# EAGLE board micromod (EAGLE 7.3.0)
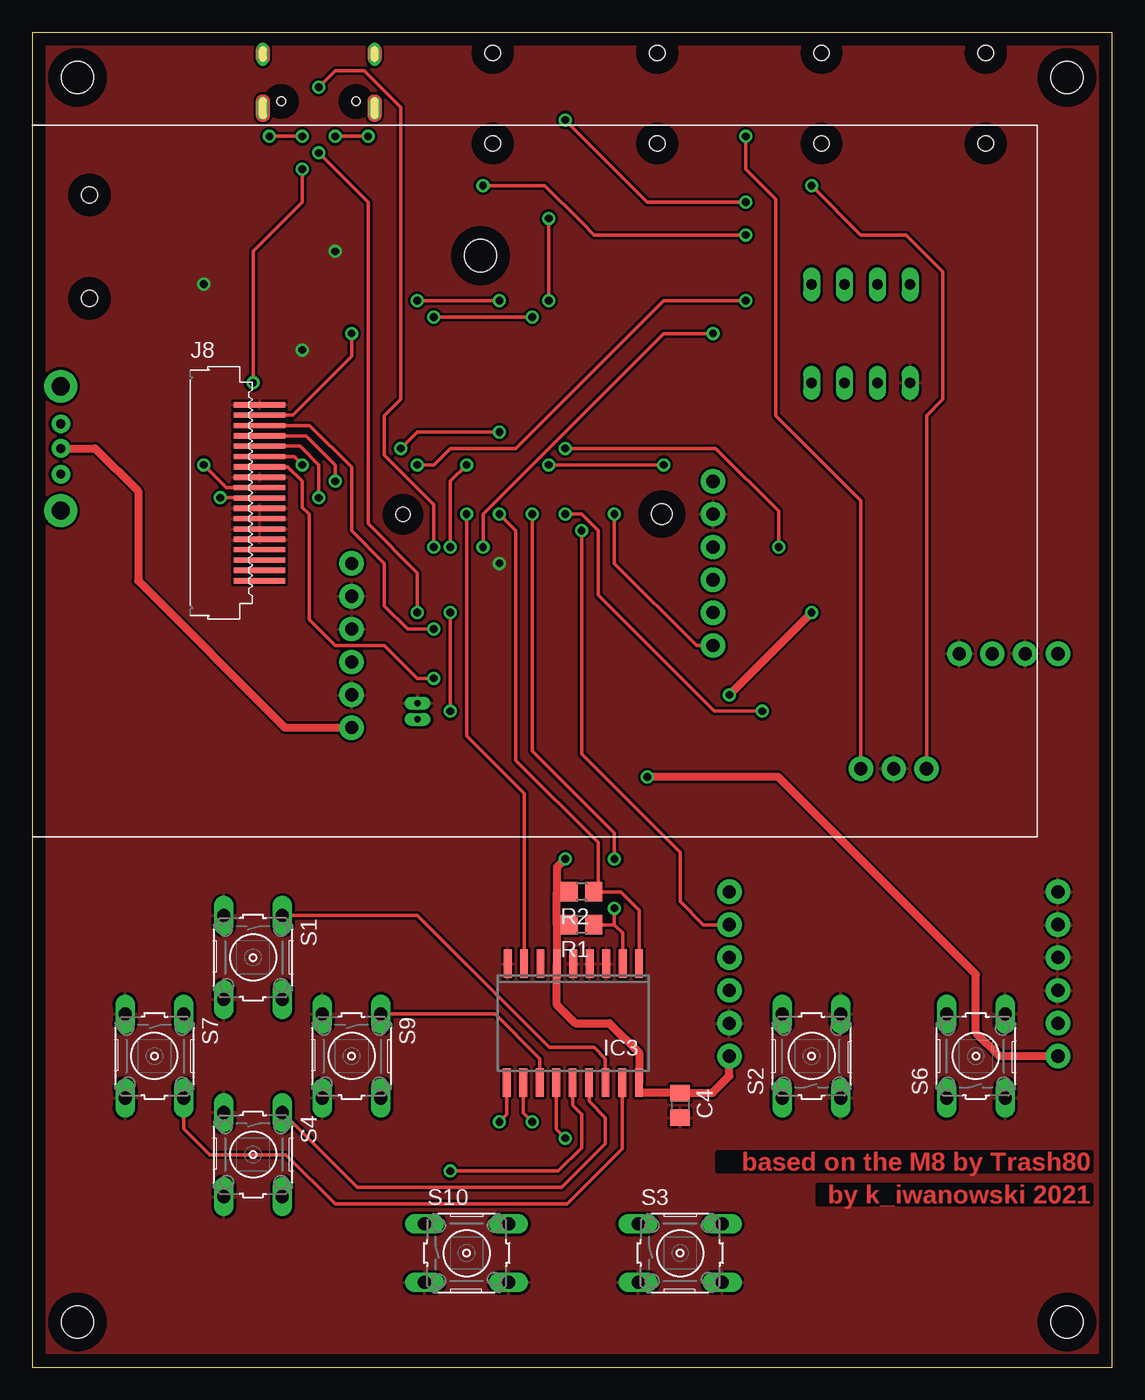
[diagram p0: board, top side]
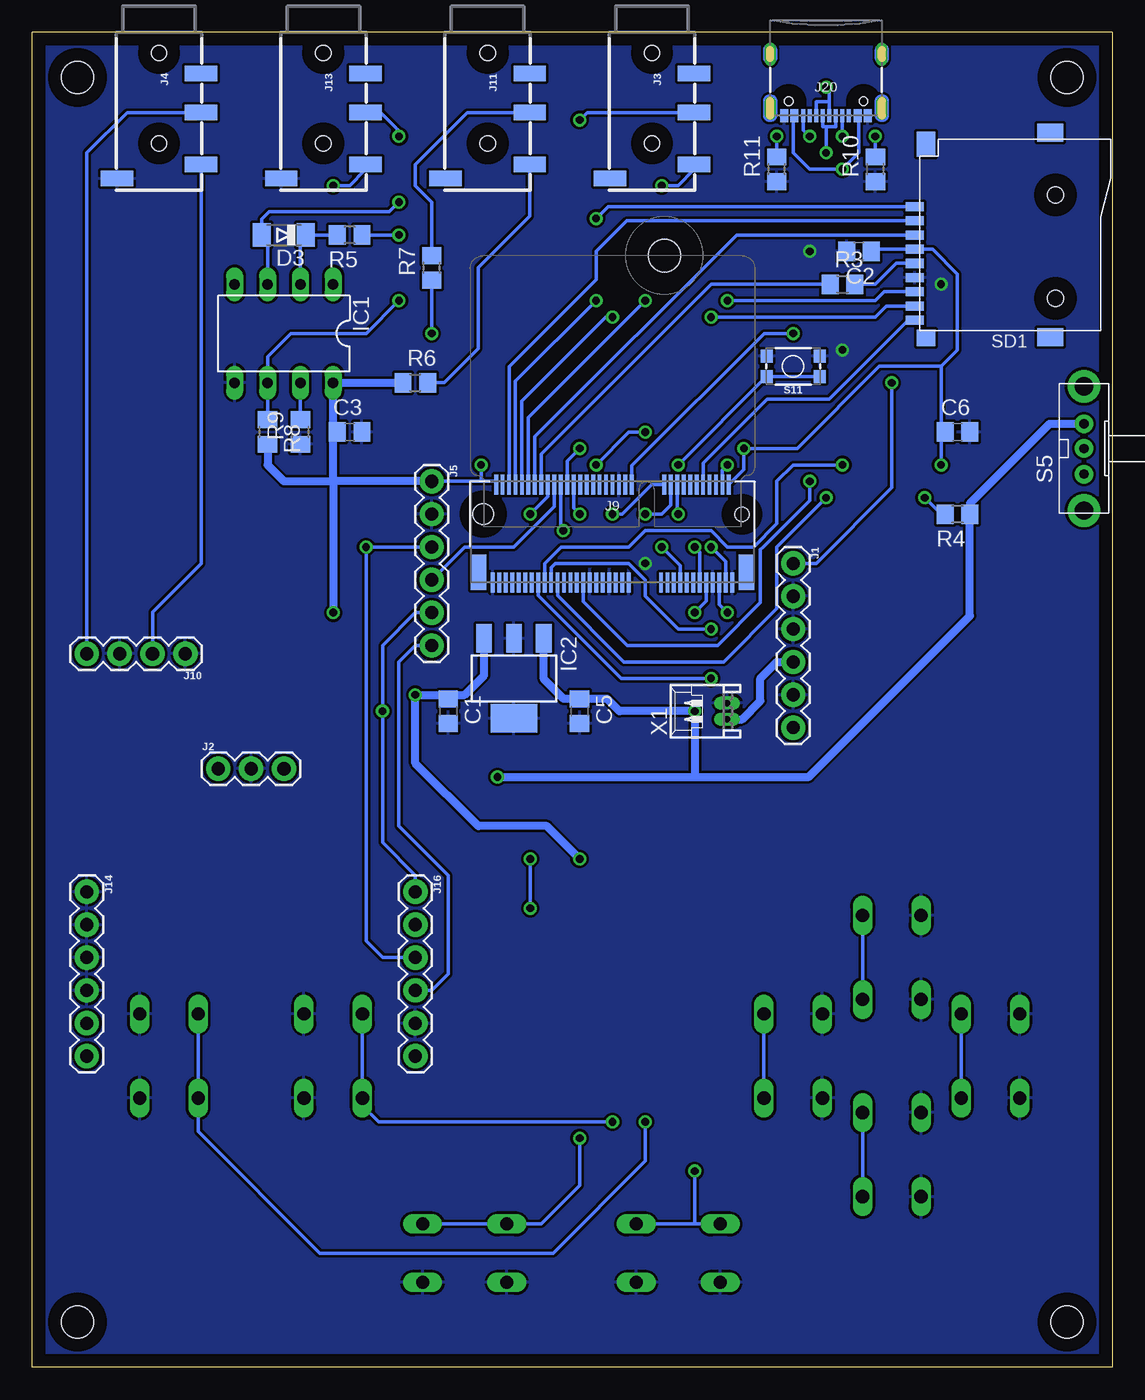
[diagram p1: board, bottom side, seen from below]

Size 83.5 x 103.23 mm. Coordinates in mm from the lower left corner, seen from the top.
Outline: 0,103.23 0,0 83.5,0 83.5,103.23 0,103.23
Copper layers (1*16): Top 0.035mm / dielectric 1.5mm / Bottom 0.035mm
Design rules "default *": minimum track width 8mil, minimum drill 24mil, track to track 8mil, track to pad 8mil, pad to pad 8mil, via to via 8mil, smd to smd 8mil, copper to edge 40mil, drill to drill 8mil, minimum pad ring 10mil, minimum via ring 8mil, stop-mask expansion 4mil, vias tented up to drill 0mil, thermal gap 8mil
Holes 2.5 mm at 3.5,99.73 80,99.73 3.5,3.5 80,3.5 34.64,85.96

## Footprints (pad centres in the part's own frame; a part is rotated, then mirrored left to right if it is on the bottom)
C0805 = smd 1.3 x 1.5: 1 -0.95,0; 2 0.95,0
MINIMELF = smd 1.4 x 1.8: A 1.7,0; C -1.7,0
DIL08 = drill 0.813 long: 1 -3.81,-3.81; 2 -1.27,-3.81; 3 1.27,-3.81; 4 3.81,-3.81; 5 3.81,3.81; 6 1.27,3.81; 7 -1.27,3.81; 8 -3.81,3.81
SOT223 = smd 1.219 x 2.235: 1 -2.311,-3.099; 2 0,-3.099; 3 2.311,-3.099 | smd 3.6 x 2.2: 4 0,3.099
SO18W = smd 0.6 x 2.2: 1 -4.445,-4.6; 2 -3.175,-4.6; 3 -1.905,-4.6; 4 -0.635,-4.6; 5 0.635,-4.6; 6 1.905,-4.6; 7 3.175,-4.6; 8 4.445,-4.6; 9 5.715,-4.6; 10 5.775,4.6; 11 4.505,4.6; 12 3.235,4.6; 13 1.965,4.6; 14 0.695,4.6; 15 -0.575,4.6; 16 -1.845,4.6; 17 -3.145,4.6; 18 -4.445,4.6
1X06 = drill 1.016 pad 1.88: 1 0,0; 2 2.54,0; 3 5.08,0; 4 7.62,0; 5 10.16,0; 6 12.7,0
1X03 = drill 1.016 pad 1.88: 1 0,0; 2 2.54,0; 3 5.08,0
AUDIO_JACK_3.5MM_TRRS_SMD_RA = smd 1.2 x 2.5: EARTH 11.3,-3.25; RING1 6.2,3.25; RING2 3.2,3.25; TIP 10.2,3.25 | hole 1.2: 1.6,0; 8.6,0
XF2E-2015-1 = smd 4 x 0.4: 2 2.54,6.8; 3 2.54,6; 4 2.54,5.2; 5 2.54,4.4; 6 2.54,3.6; 7 2.54,2.8; 8 2.54,2; 9 2.54,1.2; 10 2.54,0.4; 11 2.54,-0.4; 12 2.54,-1.2; 13 2.54,-2; 14 2.54,-2.8; 15 2.54,-3.6; 16 2.54,-4.4; 17 2.54,-5.2; 18 2.54,-6; 19 2.54,-6.8
M.2-CONNECTOR-E = smd 0.3 x 1.55: 1 9.25,-5.275; 2 9,2.275; 3 8.75,-5.275; 4 8.5,2.275; 5 8.25,-5.275; 6 8,2.275; 7 7.75,-5.275; 8 7.5,2.275; 9 7.25,-5.275; 10 7,2.275; 11 6.75,-5.275; 12 6.5,2.275; 13 6.25,-5.275; 14 6,2.275; 15 5.75,-5.275; 16 5.5,2.275; 17 5.25,-5.275; 18 5,2.275; 19 4.75,-5.275; 20 4.5,2.275; 21 4.25,-5.275; 22 4,2.275; 23 3.75,-5.275; 32 1.5,2.275; 33 1.25,-5.275; 34 1,2.275; 35 0.75,-5.275; 36 0.5,2.275; 37 0.25,-5.275; 38 0,2.275; 39 -0.25,-5.275; 40 -0.5,2.275; 41 -0.75,-5.275; 42 -1,2.275; 43 -1.25,-5.275; 44 -1.5,2.275; 45 -1.75,-5.275; 46 -2,2.275; 47 -2.25,-5.275; 48 -2.5,2.275; 49 -2.75,-5.275; 50 -3,2.275; 51 -3.25,-5.275; 52 -3.5,2.275; 53 -3.75,-5.275; 54 -4,2.275; 55 -4.25,-5.275; 56 -4.5,2.275; 57 -4.75,-5.275; 58 -5,2.275; 59 -5.25,-5.275; 60 -5.5,2.275; 61 -5.75,-5.275; 62 -6,2.275; 63 -6.25,-5.275; 64 -6.5,2.275; 65 -6.75,-5.275; 66 -7,2.275; 67 -7.25,-5.275; 68 -7.5,2.275; 69 -7.75,-5.275; 70 -8,2.275; 71 -8.25,-5.275; 72 -8.5,2.275; 73 -8.75,-5.275; 74 -9,2.275; 75 -9.25,-5.275 | smd 1.2 x 2.75: A1 10.35,-4.5; A2 -10.35,-4.5 | hole 1.1: 10,0 | hole 1.6: -10,0
1X04 = drill 1.016 pad 1.88: 1 0,0; 2 2.54,0; 3 5.08,0; 4 7.62,0
USB-C-16P-2LAYER-PADS = smd 0.3 x 1: A5 -1.25,-0.34; A6 -0.25,-0.34; A7 0.25,-0.34; A8 1.25,-0.34; B5 1.75,-0.34; B6 0.75,-0.34; B7 -0.75,-0.34; B8 -1.75,-0.34 | smd 0.6 x 1: GND -3.225,-0.34; GND2 3.225,-0.34; VBUS1 -2.45,-0.34; VBUS2 2.45,-0.34 | drill 0.4 pad 0.6 long: SHLD1 -4.318,-0.915; SHLD2 4.318,-0.915; SHLD3 -4.318,-5.095; SHLD4 4.318,-5.095 | hole 0.65: -2.89,-1.445; 2.89,-1.445
R0805 = smd 1.3 x 1.5: 1 -0.95,0; 2 0.95,0
B3F-10XX = drill 1.016 long: 1 -3.251,2.261; 2 3.251,2.261; 3 -3.251,-2.261; 4 3.251,-2.261
EG1213 = drill 0.7 pad 1.422: 1 -2,0; 2 0,0; 3 1.9,0 | drill 1.4 pad 2.54: MT1 -4.8,0; MT2 4.8,0
TACTILE_SWITCH_SMD_4.6X2.8MM = smd 0.9 x 1: 1 -2.05,-0.8; 2 2.05,-0.8; 3 2.05,0.8; 4 -2.05,0.8
TF-PULL = smd 0.7 x 1.4: 1 -2.2,-7.62; 2 -1.1,-7.62; 3 0,-7.62; 4 1.1,-7.62; 5 2.2,-7.62; 6 3.3,-7.62; 7 4.4,-7.62; 8 5.5,-7.62; 9 6.6,-7.62 | smd 1.4 x 2: S1 -7.9,2.85; S2 7.9,2.85 | smd 1.28 x 1.4: S3 7.96,-6.75 | smd 1.95 x 1.4: S4 -7.025,-6.75 | hole 1.25: -3.1,3.25; 4.9,3.25
53048-02 = drill 0.5 pad 0.698 long: 1 0.625,-1.25; 2 -0.625,-1.25

## Placement (x,y rotation side)
C1  10u  [C0805]  51.35,50.73 270 bottom
C2  10u  [C0805]  19.6,86.29 180 bottom
C3  100n  [C0805]  58.97,72.32 0 bottom
C4  100n  [C0805]  50.08,20.25 270 top
C5  10u  [C0805]  41.19,50.73 270 bottom
C6  100n  [C0805]  11.98,72.32 0 bottom
D3  [MINIMELF]  64.05,87.56 180 bottom
IC1  [DIL08]  64.05,79.94 180 bottom
IC2  [SOT223]  46.27,53.27 180 bottom
IC3  MCP23008/SO  [SO18W]  42.46,26.6 180 top
J1  [1X06]  24.68,62.16 270 bottom
J2  455-1750-1-ND  [1X03]  69.13,46.29 0 bottom
J3  AUDIO_JACK_TRRSSMD_RA  [AUDIO_JACK_3.5MM_TRRS_SMD_RA]  35.6,103.23 270 bottom
J4  AUDIO_JACK_TRRSSMD_RA  [AUDIO_JACK_3.5MM_TRRS_SMD_RA]  73.7,103.23 270 bottom
J5  [1X06]  52.62,68.51 270 bottom
J8  XF2E-2015-1  [XF2E-2015-1]  15.03,67.62 0 top
J9  MICROMOD-2222-C  [M.2-CONNECTOR-E]  38.65,65.97 0 bottom
J10  [1X04]  71.67,55.17 180 bottom
J11  AUDIO_JACK_TRRSSMD_RA  [AUDIO_JACK_3.5MM_TRRS_SMD_RA]  48.3,103.23 270 bottom
J13  AUDIO_JACK_TRRSSMD_RA  [AUDIO_JACK_3.5MM_TRRS_SMD_RA]  61,103.23 270 bottom
J14  [1X06]  79.29,36.76 270 bottom
J16  [1X06]  53.89,36.76 270 bottom
J20  [USB-C-16P-2LAYER-PADS]  22.14,96.45 180 bottom
R1  2k2  [R0805]  42.46,34.22 180 top
R2  2k2  [R0805]  42.46,36.76 180 top
R3  33  [R0805]  20.87,83.75 0 bottom
R4  68  [R0805]  11.98,65.97 180 bottom
R5  220  [R0805]  58.97,87.56 180 bottom
R6  33  [R0805]  53.89,76.13 0 bottom
R7  10  [R0805]  52.62,85.02 90 bottom
R8  470  [R0805]  65.32,72.32 270 bottom
R9  1k  [R0805]  62.78,72.32 90 bottom
R10  5k1  [R0805]  18.33,92.64 90 bottom
R11  5k1  [R0805]  25.95,92.64 90 bottom
S1  [B3F-10XX]  17.06,31.68 270 top
S2  [B3F-10XX]  60.24,24.06 90 top
S3  [B3F-10XX]  50.08,8.82 0 top
S4  [B3F-10XX]  17.06,16.44 270 top
S5  EG1213  [EG1213]  2.2,71.05 90 bottom
S6  [B3F-10XX]  72.94,24.06 90 top
S7  [B3F-10XX]  9.44,24.06 270 top
S9  [B3F-10XX]  24.68,24.06 270 top
S10  [B3F-10XX]  33.57,8.82 0 top
S11  MOMENTARY-SWITCH-SPST-SMD-4.6X2.8MM  [TACTILE_SWITCH_SMD_4.6X2.8MM]  24.68,77.4 180 bottom
SD1  TF-HOLDER  [TF-PULL]  7.66,87.56 270 bottom
X1  53048-02  [53048-02]  31.03,50.73 90 bottom

## Library data of the parts
C1-C6 R1-R11 = rcl
D3 = diode
IC1 = ic-package
IC2 = linear-technology; MPN: LT1129CST-5#PBF; OC_FARNELL: 1663375; OC_NEWARK: 57M2069
IC3 S5 = adafruit
J1 J5 J14 J16 = lbr_SparkFun-Eagle-Libraries_SparkFun-Connectors; PROD_ID: CONN-08437
J2 = lbr_SparkFun-Eagle-Libraries_SparkFun-Connectors; PROD_ID: XXX-00000
J3 J4 J11 J13 = lbr_SparkFun-Eagle-Libraries_SparkFun-Connectors; PROD_ID: CONN-10676; SF_ID: PRT-12639
J8 = con-omron-kopia; MPN: XF2E-2015-1; OC_FARNELL: unknown; OC_NEWARK: 37M9453
J9 = SparkFun-MicroMod; PROD_ID: CONN-14877
J10 = lbr_SparkFun-Eagle-Libraries_SparkFun-Connectors; PROD_ID: CONN-09696
J20 = SparkFun-Connectors; PROD_ID: CONN-14122
S1-S4 S6 S7 S9 S10 = switch-omron; MPN: B3F-1000; OC_FARNELL: 176432; OC_NEWARK: 36M3542
S11 = SparkFun-Switches; PROD_ID: SWCH-15606
SD1 = sd-mmc
X1 = con-molex; MF: MOLEX; MPN: 53048-0210; OC_FARNELL: 1012259; OC_NEWARK: 57H4718

## Nets
3V3: C1.1 C2.1 C3.1 C4.1 C6.1 IC1.8 IC2.3 IC3.6 IC3.18 J5.1 J8.10 J9.2 J9.74 J16.6 R1.2 R2.2 R6.1 R8.2 SD1.4
A: IC3.10 S6.1 S6.2
B: IC3.11 S2.1 S2.2
BCK: J5.5 J9.50 J16.1
CS: J8.6 J9.55
D_D: IC3.15 S4.1 S4.2
D_L: IC3.17 S7.1 S7.2
D_R: IC3.12 S9.1 S9.2
D_U: IC3.16 S1.1 S1.2
DC: J8.5 J9.47
DIN: J5.4 J9.56
DOUT: J9.54 J16.2
GND: C1.2 C2.2 C3.2 C4.2 C5.2 C6.2 IC1.5 IC2.2 IC2.4 IC3.3 IC3.4 IC3.5 IC3.9 J1.2 J1.3 J1.5 J2.2 J4.EARTH J5.2 J8.2 J8.9 J8.12 J8.13 J8.14 J8.15 J9.1 J9.7 J9.33 J9.36 J9.39 J9.45 J9.75 J10.1 J10.3 J13.EARTH J14.1 J14.2 J14.3 J14.4 J16.5 J20.GND J20.GND2 R9.1 R10.1 R11.1 S1.3 S1.4 S2.3 S2.4 S3.3 S3.4 S4.3 S4.4 S6.3 S6.4 S7.3 S7.4 S9.3 S9.4 S10.3 S10.4 S11.1 S11.2 SD1.6 X1.1
IN_INT: IC3.8 J9.18
IN_SCL: IC3.1 J9.20 R2.1
IN_SDA: IC3.2 J9.22 R1.1
LRCK: J5.3 J9.52 J16.3
MIDI_IN: IC1.6 J9.4 R8.1
MIDI_OUT: J9.17 R7.1
MISO: J8.8 J9.61
MOSI: J8.7 J9.59
N$1: J8.11 R4.2
N$2: J2.3 J13.RING1
N$3: J2.1 J13.TIP
N$4: J4.RING1 J10.4
N$5: J4.TIP J10.2
N$6: J1.4 X1.2
N$7: R3.2 SD1.5
N$8: J20.A5 R10.2
N$9: J20.B5 R11.2
N$10: J9.11 S11.3 S11.4
N$11: J3.TIP R5.1
N$12: J11.TIP R6.2
N$13: J11.RING1 R7.2
N$18: D3.C IC1.2 R5.2
N$19: D3.A IC1.3 J3.RING1
N$22: IC1.7 R9.2
N$24: J1.6 S5.2
RESET: J8.3 J9.32
SCK: J8.4 J9.57
SCL: J5.6 J9.58 J16.4
SD_CHECK: J9.10 SD1.9
SD_CLK: J9.60 R3.1
SD_CMD: J9.62 SD1.3
SD_DAT0: J9.64 SD1.7
SD_DAT1: J9.66 SD1.8
SD_DAT2: J9.68 SD1.1
SD_DAT3: J9.70 SD1.2
SELECT: IC3.14 S10.1 S10.2
START: IC3.13 S3.1 S3.2
USB_DN: J9.5 J20.A7 J20.B7
USB_DP: J9.3 J20.A6 J20.B6
VCC: C5.1 IC2.1 J9.9 J14.6 R4.1 S5.3
VUSB: J1.1 J20.VBUS1 J20.VBUS2

## Tracks (layer width: path | path; a pad name or v marks a point on that pad's centre or on a via)
3V3  (via drill 0.6)
  Top 0.254: J8.10 15.01,68.02 v13.25,69.78 | v48.81,69.78 v39.92,69.78 | v28.49,71.05 29.76,72.32 v36.11,72.32
  Top 0.61: 46.91,21.84 IC3.18 | IC3.18 46.91,24.31 44.62,26.6 41.98,26.6 40.55,28.02 IC3.6 40.55,34.22 | 40.55,34.22 40.55,36.76 | R1.2 40.55,34.22 | R2.2 40.55,36.76 | v41.19,39.3 40.55,38.66 40.55,36.76 | v60.24,58.35 v53.89,52 | IC3.18 46.91,21.2 C4.1 52.58,21.2 53.89,22.51 J16.6
  Bottom 0.254: 13.25,77.4 11.98,78.67 11.98,84.54 13.9,86.46 SD1.4 18.65,86.46 C2.1 | 13.25,77.4 18.02,77.4 24.37,71.05 v28.49,71.05 28.49,69.41 J9.2 | J5.1 48.81,68.51 | 48.81,68.51 v48.81,69.78 | 48.81,68.51 47.65,68.51 J9.74 | v39.92,69.78 37.38,72.32 v36.11,72.32 | v13.25,69.78 13.25,72.32 | 13.25,72.32 13.25,77.4 | C6.1 13.25,72.32
  Bottom 0.61: 60.24,72.32 IC1.8 R6.1 | v41.19,39.3 43.73,41.84 49.02,41.84 53.89,46.7 v53.89,52 51.35,52 | J5.1 60.24,68.51 | 60.24,68.51 60.24,72.32 | 60.24,72.32 C3.1 | 60.24,68.51 v60.24,58.35 | 51.35,52 C1.1 | 51.35,52 50.08,52 48.58,53.5 IC2.3 | R8.2 65.32,69.78 64.05,68.51 60.24,68.51
A  (via drill 0.6)
  Top 0.254: v36.11,18.98 36.69,19.55 IC3.10
  Bottom 0.254: S6.2 S6.1 70.68,18.22 61.28,8.82 43.23,8.82 36.11,15.94 v36.11,18.98
B  (via drill 0.6)
  Top 0.254: v38.65,18.98 37.95,19.68 IC3.11
  Bottom 0.254: S2.2 S2.1 57.98,20.22 56.73,18.98 v38.65,18.98
BCK  (via drill 0.6)
  Top 0.254: v41.19,65.97 42.46,65.97 43.73,64.7 43.73,59.7 52.7,50.73 v56.43,50.73
  Bottom 0.254: J16.1 53.89,38.03 56.43,40.57 v56.43,50.73 56.43,55.81 53.89,58.35 J5.5 | v41.19,65.97 41.65,66.43 J9.50
CS  (via drill 0.6)
  Top 0.254: J8.6 20.7,71.22 22.14,69.78 v22.14,67.24
  Bottom 0.254: J9.55 42.9,59.66 37.78,54.54 30.07,54.54 25.95,58.66 25.95,63.43 v22.14,67.24
D_D
  Top 0.254: S4.1 25.11,13.9 40.94,13.9 44.3,17.26 44.3,19.27 43.04,20.54 IC3.15
  Bottom 0.254: S4.1 S4.2
D_L
  Top 0.254: IC3.17 45.61,16.88 41.36,12.63 23.41,12.63 19.6,16.44 13.7,16.44 11.7,18.44 S7.2
  Bottom 0.254: S7.1 S7.2
D_R
  Top 0.254: S9.1 35.77,27.31 39.23,23.86 IC3.12
  Bottom 0.254: S9.2 S9.1
D_U
  Top 0.254: S1.1 29.76,34.93 39.96,24.73 43.42,24.73 44.3,23.85 IC3.16
  Bottom 0.254: S1.1 S1.2
DC  (via drill 0.6)
  Top 0.254: J8.5 21.17,72.02 23.41,69.78 v23.41,68.51
  Bottom 0.254: J9.47 40.9,59.2 37.51,55.81 30.53,55.81 27.22,59.12 27.22,63.21 27,63.43 23.41,67.02 v23.41,68.51
DIN
  Bottom 0.254: J9.56 43.15,66.57 46.29,63.43 50.08,63.43 J5.4
DOUT  (via drill 0.6)
  Top 0.254: J16.2 51.88,34.22 50.08,36.02 50.08,39.8 42.46,47.42 v42.46,64.7
  Bottom 0.254: v42.46,64.7 42.65,64.89 J9.54
GND  (via drill 0.6)
  other vias: 13.25,83.75 23.41,86.29 36.11,62.16 20.87,78.67
  pour Bottom: -0.72,104.07 84.37,104.07 84.37,-1.34 -0.72,-1.34
  pour Top: 84.37,104.07 84.37,-1.34 -0.72,-1.34 -0.72,104.07
IN_INT  (via drill 0.6)
  Top 0.254: IC3.8 38.02,44.38 33.57,48.83 v33.57,65.97
  Bottom 0.254: v33.57,65.97 33.65,66.05 J9.18
IN_SCL  (via drill 0.6)
  Top 0.254: 43.73,36.76 45.48,36.76 46.91,35.34 IC3.1 | R2.1 43.73,36.76 | 43.73,36.76 43.73,40.57 37.38,46.92 37.38,64.7 v36.11,65.97
  Bottom 0.254: v36.11,65.97 34.84,65.97 34.15,66.66 J9.20
IN_SDA  (via drill 0.6)
  Top 0.254: R1.1 45,34.22 | IC3.2 45.63,33.59 45,34.22 | v38.65,65.97 38.65,47.66 45,41.31 v45,39.3 | 45,34.22 v45,35.49
  Bottom 0.254: 34.65,68.32 J9.22 35.63,68.25 37.91,65.97 v38.65,65.97 | v45,35.49 v45,39.3
LRCK  (via drill 0.6)
  Top 0.254: v41.19,71.05 52.84,71.05 57.7,66.19 v57.7,63.43
  Bottom 0.254: v41.19,71.05 42.15,70.09 J9.52 | J16.3 56.43,31.68 57.7,32.95 v57.7,63.43 J5.3
MIDI_IN  (via drill 0.6)
  Top 0.254: v29.76,69.78 31.03,69.78 32.3,71.05 37.38,71.05 48.81,82.48 v55.16,82.48
  Bottom 0.254: v29.76,69.78 30.15,69.39 J9.4 | R8.1 IC1.6 65.32,78.14 63.52,79.94 57.7,79.94 v55.16,82.48
MIDI_OUT  (via drill 0.6)
  Top 0.254: v52.62,79.94 48.81,79.94 34.84,65.97 v34.84,63.43
  Bottom 0.254: v34.84,63.43 33.4,61.99 J9.17 | v52.62,79.94 R7.1
MISO  (via drill 0.6)
  Top 0.254: J8.8 19.76,69.62 20.87,68.51 20.87,66.5 21.4,65.97 21.4,57.82 23.41,55.81 27.22,55.81 29.76,53.27 v31.03,53.27
  Bottom 0.254: J9.61 44.4,59.68 37.99,53.27 v31.03,53.27
MOSI  (via drill 0.6)
  Top 0.254: J8.7 20.23,70.42 v20.87,69.78
  Bottom 0.254: J9.59 43.9,62.15 42.62,63.43 37.38,63.43 36.11,64.7 31.03,64.7 29.76,63.43 27.75,63.43 25.95,65.23 25.95,68.51 24.68,69.78 v20.87,69.78
N$1  (via drill 0.6)
  Top 0.254: v14.52,67.24 17.57,67.24 J8.11
  Bottom 0.254: R4.2 13.25,65.97 v14.52,67.24
N$2  (via drill 0.6)
  Top 0.254: J2.3 64.05,67.02 57.48,73.59 57.48,90.32 55.16,92.64 v55.16,95.18
  Bottom 0.254: J13.RING1 56.56,97.03 55.16,95.63 v55.16,95.18
N$3  (via drill 0.6)
  Top 0.254: J2.1 69.13,73.59 70.4,74.86 70.4,84.72 67.56,87.56 64.05,87.56 v60.24,91.37
  Bottom 0.254: v60.24,91.37 58.97,91.37 57.75,92.59 J13.TIP
N$4
  Bottom 0.254: J4.RING1 76.17,97.03 79.29,93.91 J10.4
N$5
  Bottom 0.254: J10.2 74.21,58.4 70.45,62.16 J4.TIP
N$6
  Bottom 0.61: X1.2 28.64,50.11 27.22,51.52 27.22,53.27 25.95,54.54 J1.4
N$7
  Bottom 0.254: SD1.5 16.72,85.36 18.33,83.75 R3.2
N$8  (via drill 0.6)
  Top 0.254: v18.33,95.18 v20.87,95.18
  Bottom 0.254: v20.87,95.18 20.89,95.18 J20.A5 | R10.2 v18.33,95.18
N$9  (via drill 0.6)
  Top 0.254: v25.95,95.18 v23.41,95.18
  Bottom 0.254: R11.2 v25.95,95.18 | v23.41,95.18 23.89,95.66 J20.B5
N$10  (via drill 0.6)
  Top 0.254: v32.3,63.43 32.3,68.51 v33.57,69.78
  Bottom 0.254: v32.3,63.43 31.9,63.03 J9.11 | v33.57,69.78 26.75,76.6 S11.3 S11.4
N$11  (via drill 0.6)
  Top 0.254: v55.16,87.56 43.43,87.56 42.46,88.53 39.62,91.37 v34.84,91.37
  Bottom 0.254: R5.1 v55.16,87.56 | v34.84,91.37 33.57,91.37 32.35,92.59 J3.TIP
N$12
  Bottom 0.254: J11.TIP 45.05,89 49.03,85.02 49.03,78.78 51.68,76.13 R6.2
N$13
  Bottom 0.254: J11.RING1 49.87,97.03 53.89,93.01 53.89,91.37 52.62,90.1 R7.2
N$18
  Bottom 0.254: IC1.2 62.78,87.13 D3.C R5.2
N$19  (via drill 0.6)
  Top 0.254: v55.16,90.1 47.54,90.1 v41.19,96.45
  Bottom 0.254: IC1.3 65.32,87.13 D3.A 65.75,88.78 65.18,89.35 55.91,89.35 v55.16,90.1 | J3.RING1 40.61,97.03 v41.19,96.45
N$22
  Bottom 0.254: R9.2 IC1.7
N$24
  Top 0.61: S5.2 4.86,71.05 8.17,67.74 8.17,60.82 19.53,49.46 J1.6
RESET  (via drill 0.6)
  Top 0.254: J8.3 20.12,73.62 24.68,78.18 v24.68,79.94
  Bottom 0.254: v24.68,79.94 26.94,79.94 37.15,69.73 J9.32
SCK  (via drill 0.6)
  Top 0.254: J8.4 21.46,72.82 24.68,69.6 24.68,64.7 27.22,62.16 27.22,58.88 29.02,57.08 v31.03,57.08
  Bottom 0.254: J9.57 43.4,61.83 43.07,62.16 37.38,62.16 36.11,60.89 36.11,59.62 33.57,57.08 v31.03,57.08
SCL  (via drill 0.6)
  Top 0.254: J5.6 51.35,55.81 45,62.16 v45,65.97
  Bottom 0.254: J16.4 52.62,29.14 51.35,30.41 51.35,38.03 55.16,41.84 55.16,54.54 53.89,55.81 J5.6 | v45,65.97 43.65,67.32 J9.58
SD_CHECK
  Bottom 0.254: J9.10 31.65,69.91 26.7,74.86 21.89,74.86 15.79,80.96 SD1.9
SD_CLK
  Bottom 0.254: R3.1 31.03,83.75 44.15,70.63 J9.60
SD_CMD
  Bottom 0.254: J9.62 44.65,71.97 29.06,87.56 SD1.3
SD_DAT0  (via drill 0.6)
  Top 0.254: v29.76,82.48 v36.11,82.48
  Bottom 0.254: v36.11,82.48 45.15,73.44 J9.64 | SD1.7 17.65,83.16 18.33,82.48 v29.76,82.48
SD_DAT1  (via drill 0.6)
  Top 0.254: v38.65,81.21 v31.03,81.21
  Bottom 0.254: SD1.8 17.48,82.06 18.33,81.21 v31.03,81.21 | J9.66 45.65,74.72 39.16,81.21 v38.65,81.21
SD_DAT2  (via drill 0.6)
  Top 0.254: v39.92,88.83 v39.92,82.48
  Bottom 0.254: SD1.1 38.99,89.76 v39.92,88.83 | v39.92,82.48 46.15,76.25 J9.68
SD_DAT3
  Bottom 0.254: SD1.2 37.55,88.66 39.92,86.29 39.92,84.09 46.65,77.36 J9.70
SELECT  (via drill 0.6)
  Top 0.254: v32.3,15.17 40.66,15.17 42.46,16.97 42.46,19.55 41.77,20.25 IC3.14
  Bottom 0.254: 32.3,11.08 v32.3,15.17 | S10.2 32.3,11.08 | 32.3,11.08 S10.1
START  (via drill 0.6)
  Top 0.254: v41.19,17.71 40.5,18.41 IC3.13
  Bottom 0.254: S3.2 S3.1 44.16,11.08 41.19,14.06 v41.19,17.71
USB_DN  (via drill 0.6)
  Top 0.254: v22.14,93.91 25.95,90.1 25.95,65.23 29.76,61.42 v29.76,58.35
  Bottom 0.254: J20.A7 22.39,95.93 22.14,95.93 | J20.B7 21.39,95.93 22.14,95.93 | v29.76,58.35 30.4,58.99 J9.5 | v22.14,93.91 22.14,95.93
USB_DP  (via drill 0.6)
  Top 0.254: v22.14,98.99 23.41,100.26 25.65,100.26 28.49,97.42 28.49,74.86 27.22,73.59 27.22,70.52 31.03,66.71 v31.03,63.43
  Bottom 0.254: 21.89,97.85 21.89,98.74 v22.14,98.99 | 21.89,97.85 J20.A6 | J20.B6 22.89,97.85 21.89,97.85 | v31.03,63.43 29.9,62.3 J9.3
VCC  (via drill 0.6)
  Top 0.254: v32.3,58.35 v32.3,50.73
  Top 0.61: v47.54,45.65 57.65,45.65 72.94,30.36 72.94,25.86 74.74,24.06 J14.6
  Bottom 0.254: v32.3,58.35 31.4,59.25 J9.9
  Bottom 0.61: v47.54,45.65 32.3,45.65 | S5.3 4.88,72.95 11.03,66.8 R4.1 11.03,58.09 23.48,45.65 32.3,45.65 | 32.3,45.65 v32.3,50.73 38.12,50.73 39.07,51.68 C5.1 42.43,51.68 43.96,53.21 IC2.1
VUSB  (via drill 0.6)
  Top 0.254: v20.87,92.64 20.87,90.1 17.06,86.29 v17.06,76.13
  Bottom 0.254: J20.VBUS2 24.68,96.79 24.68,93.91 23.41,92.64 v20.87,92.64 19.6,93.91 19.6,96.79 J20.VBUS1 | J1.1 22.91,62.16 17.06,68.01 v17.06,76.13

## Text on the board
Top: based on the M8 by Trash80 | by k_iwanowski 2021